# Altium PCB power.PcbDoc
Units mm, origin at the board's own origin, x right, y up, seen from the top; angles counter-clockwise.
Board outline 169.7 x 138.9 mm, 2 copper layers (Top Layer, Bottom Layer); 53 components, 30 nets, 201 pads, 0 vias.
Unrouted connection lines stored in the file: 2.
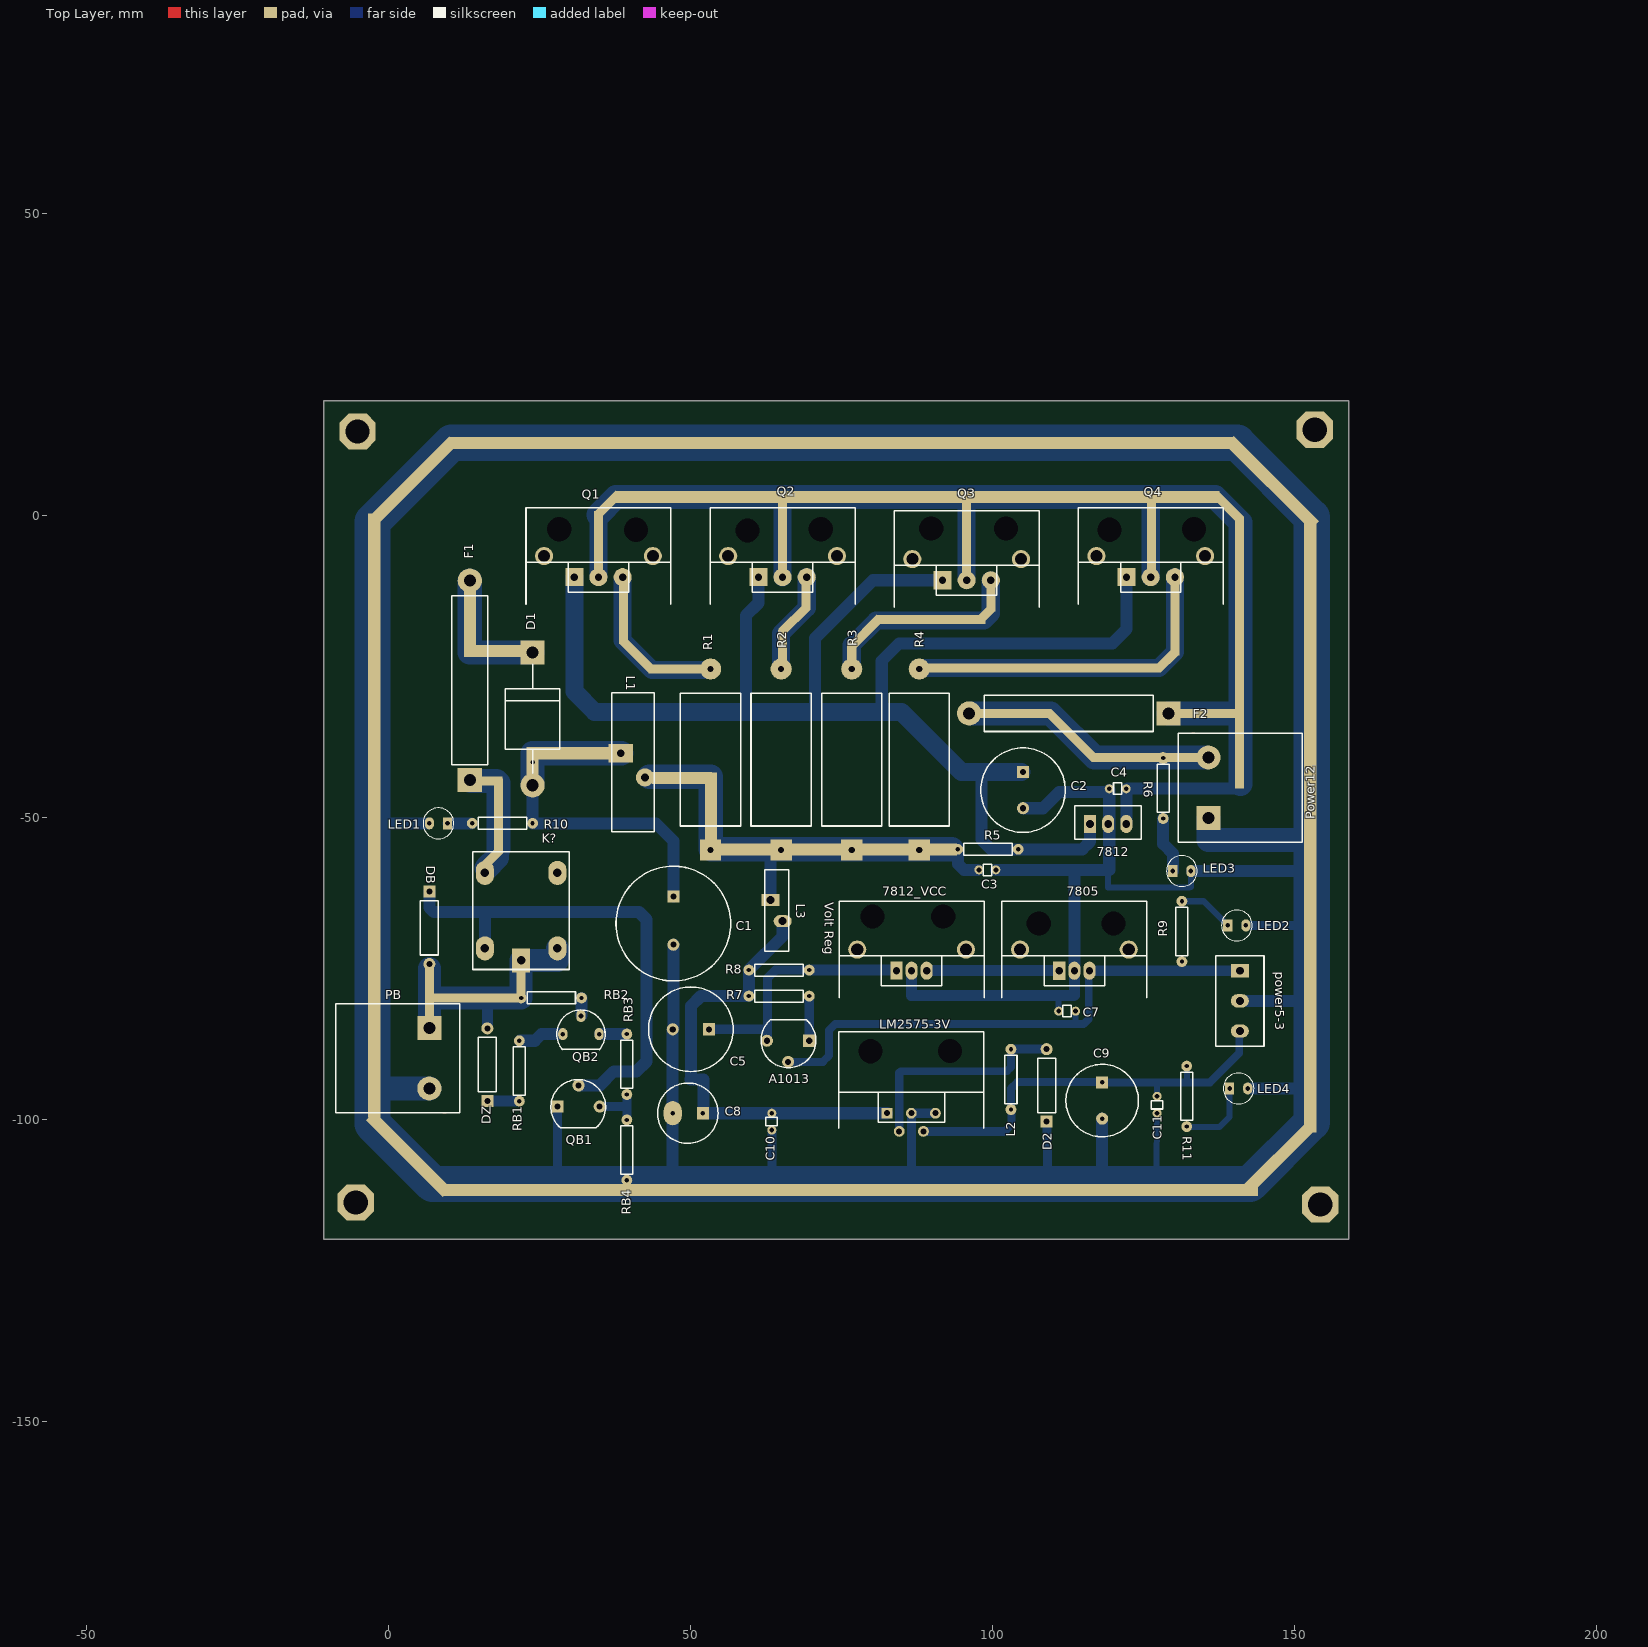
[diagram p0: Top Layer view]
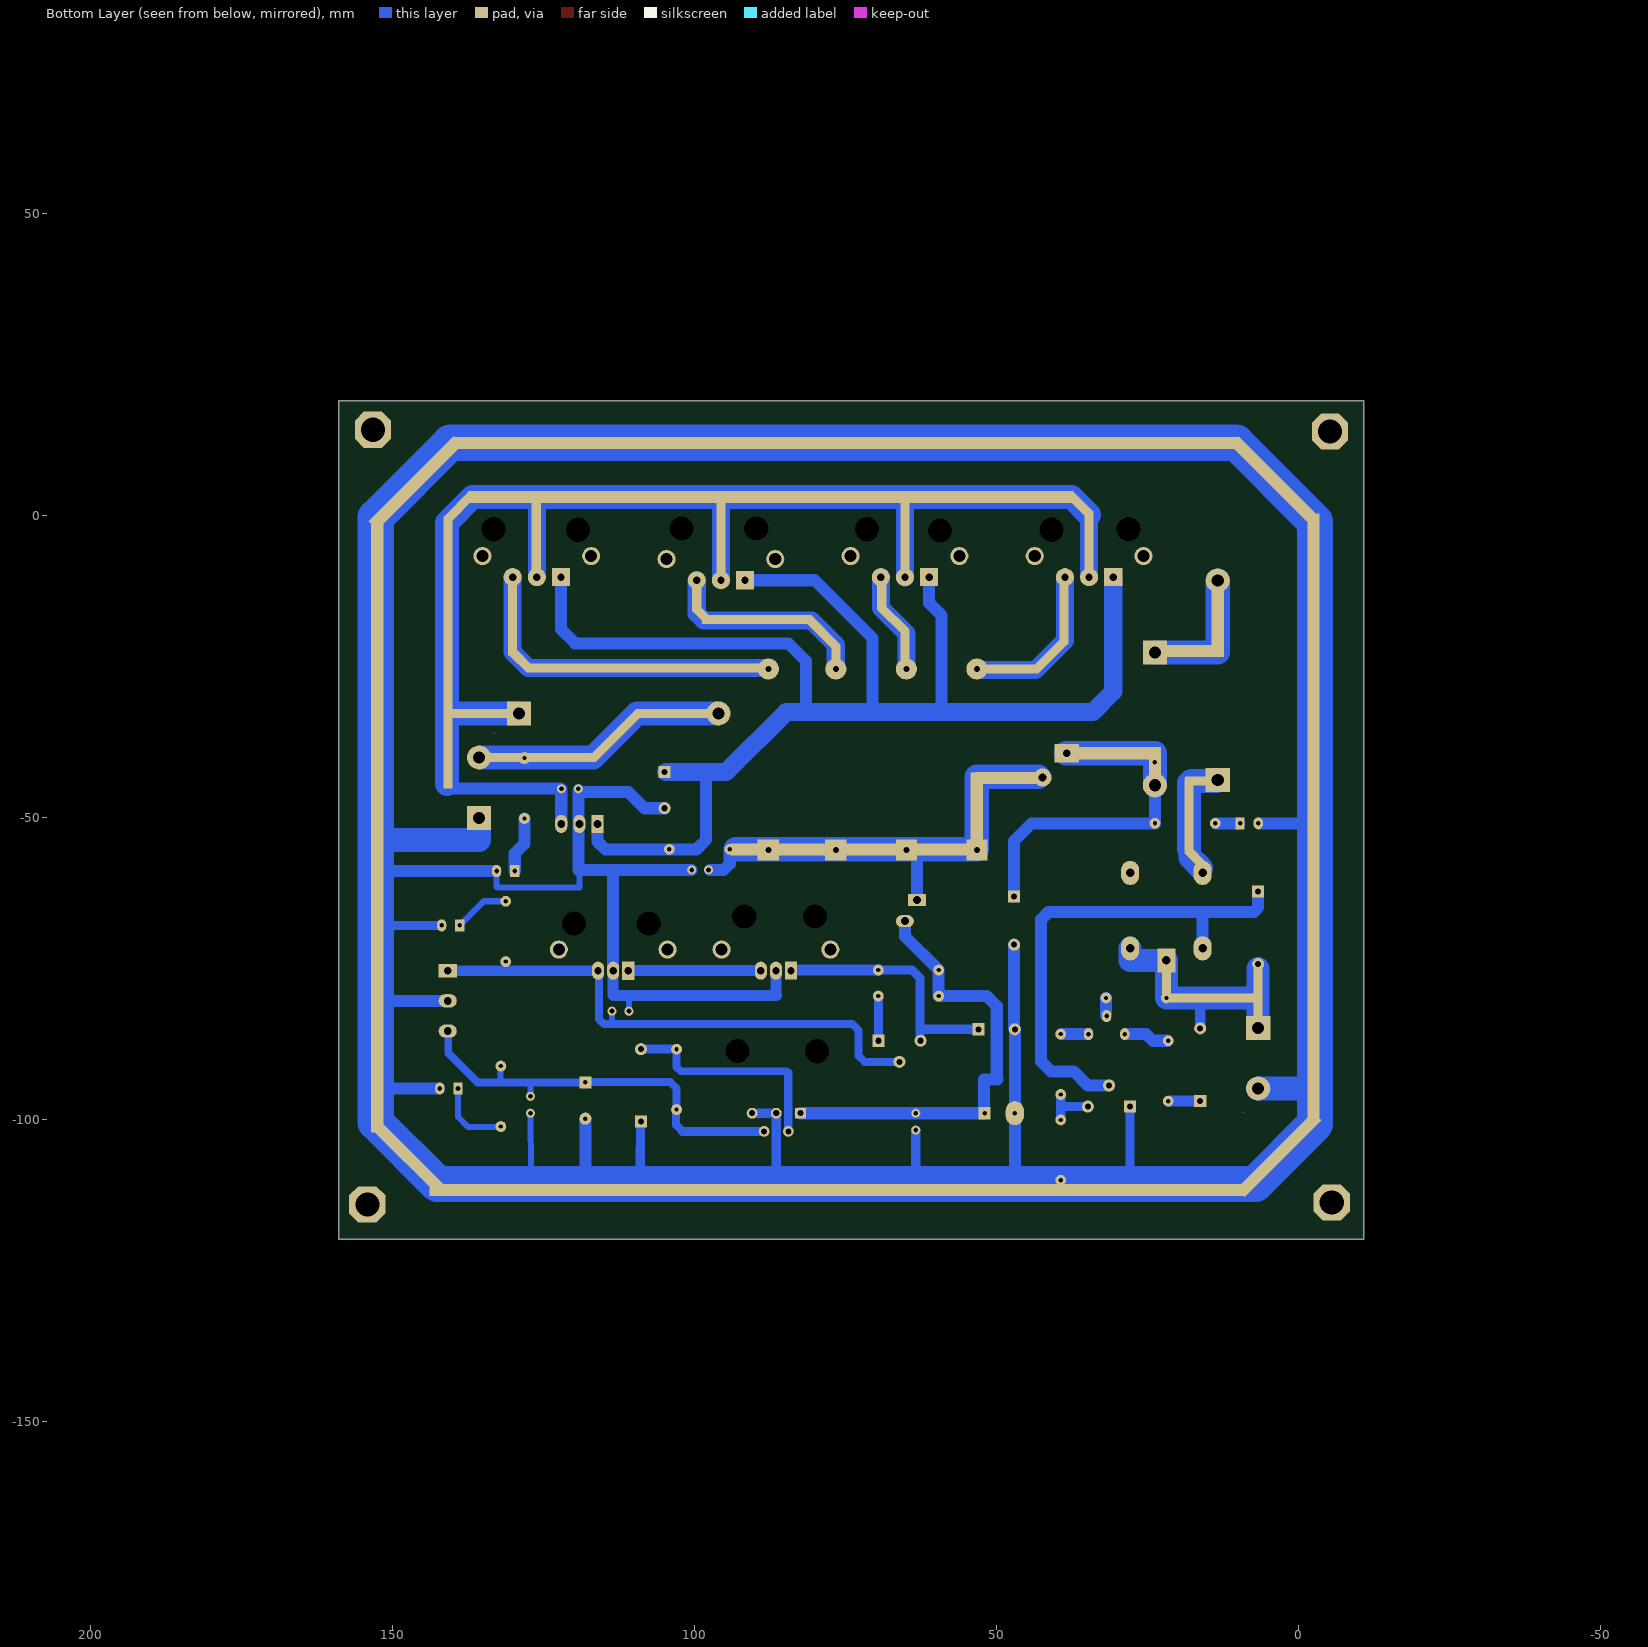
[diagram p1: Bottom Layer view, seen from below]

## Layer stack, top to bottom
Top Layer: signal copper 0.0356
Dielectric: dielectric 0.32, FR-4, Dk 4.8
Bottom Layer: signal copper 0.0356

## Board outline
-10.6,19.1 158.9,19.1 158.9,-119.8 -10.8,-119.8 -10.8,19.1

## Design rules (kind name [scope] priority, off if disabled: settings)
Clearance [All] p1: gap=0.254
FabricationTestPointUsage TestPointUsage [All] p1: valid=0 allowmultiple=FALSE
FabricationTestpoint Testpoint [All] p1: side=3 testpointundercomponent=TRUE minsize=1.016 maxsize=2.54 preferedsize=1.524 minholesize=0 maxholesize=1.016 preferedholesize=0.813 testpointgrid=0.025 allowsidetop=TRUE allowsidebottom=TRUE usegrid=TRUE gridtolerance=0
PolygonConnect [All] p1: connectstyle=Relief reliefconductorwidth=0.254 reliefentries=4 polygonreliefangle="90 Angle"
RoutingVias [All] p1: holewidth=0.711 width=1.27 viastyle="Through Hole" minholewidth=0.711 minwidth=1.27 maxholewidth=0.711 maxwidth=1.27
SilkscreenOverComponentPads [All] p1: minsilkscreentomaskgap=0.254
SolderMaskExpansion [All] p1: expansion=0.102
Width [All] p1: maxlimit=0.254 minlimit=0.254 preferedwidth=0.254
25 further rules are at their usual default settings.

## Components (designator, comment, footprint, x,y, rotation, side; value= is the part's Value field where it differs from the comment)
7805 "Volt Reg" 78xx 113.5,-75.3 r0 top
7812 "Volt Reg" 78xx_NO 118.6,-51 r0 top
7812_VCC "Volt Reg" 78xx 86.548,-75.299 r0 top
A1013 "PNP" D468/A1013 68.6,-86.9 r180 top
C1 "Cap2" "Tu 4700u/35V" 47.1,-63 r270 top
C2 "Cap2" "Tu 1000u/50V" 105,-42.4 r270 top
C3 "Cap Semi" tu_gom 98.7,-58.7 r180 top
C4 "Cap Semi" tu_gom 121.076,-45.076 r0 top
C5 "Cap2" "Tu 1000u/50V" 53,-85 r180 top
C7 "Cap Semi" tu_gom 112.7,-81.9 r0 top
C8 "Cap2" "TU 220uF/50V" 52,-98.9 r180 top
C9 "Cap2" "TU 470uF/50V" 118.1,-93.8 r270 top
C10 "Cap Semi" tu_gom 63.3,-99.9 r90 top
C11 "Cap Semi" tu_gom 127.1,-97.1 r90 top
D1 "Diode" D_10A 23.8,-30.6 r270 top
D2 "Diode" D_1A 108.9,-100.3 r90 top
DB "Diode" D_1A 6.7,-62.2 r270 top
DZ "D Zener 30V" D_1A 16.3,-96.849 r90 top
F1 "Fuse 1" FUSE_10A 13.4,-43.7 r90 top
F2 "Fuse 2" FUSE_10A 129.08,-32.692 r180 top
K? "Relay-SPDT" "Role 12V" 25.9,-63.1 r270 top
L1 "Inductor" "Cuon cam to" 35.4,-40.3 r0 top
L2 "Inductor" R_Nor#1 103,-93.3 r270 top
L3 "Inductor" "Cuon cam nho" 61.2,-64.6 r0 top
LED1 "LED" LED_3 8.7,-50.9 r180 top
LED2 "LED" LED_3 139.9,-67.8 r0 top
LED3 "LED" LED_3 130.8,-58.8 r0 top
LED4 "LED" LED_3 140.2,-94.8 r0 top
LM2575-3V "LM2575-xx" LM2575_3 82.5,-98.9 r0 top
PB "Header 2" Header_nguon_20A 6.7,-84.8 r270 top
power5-3 "Header 3" HEADER3 140.9,-80.3 r270 top
Power12 "Header 2" Header_nguon_20A 135.7,-50 r90 top
Q1 "TIP42C" TIP42C 33.703,-13.642 r0 top
Q2 "TIP42C" TIP42C 64.183,-13.642 r0 top
Q3 "TIP42C" TIP42C 94.663,-14.15 r0 top
Q4 "TIP42C" TIP42C 125.143,-13.642 r0 top
QB1 "D468" D468/A1013 28.9,-97.8 r0 top
QB2 "2N3904" C1815 31.3,-85.3 r0 top
R1 "Res3" R_CS1R/5W 53.271,-55.341 r90 top
R2 "Res3" R_CS1R/5W 64.955,-55.341 r90 top
R3 "Res3" R_CS1R/5W 76.639,-55.341 r90 top
R4 "Res3" R_CS1R/5W 87.815,-55.341 r90 top
R5 "Res3" R_Nor#1 99.2,-55.2 r0 top
R6 "Res3" R_Nor#2 128.2,-45.1 r90 top
R7 "Res3" R_Nor#1 64.6,-79.5 r0 top
R8 "Res3" R_Nor#1 64.6,-75.2 r0 top
R9 "Res3" R_Nor#1 131.3,-68.8 r270 top
R10 "Res3" R_Nor#1 18.8,-50.9 r0 top
R11 "Res3" R_Nor#1 132.1,-96.1 r90 top
RB1 "Res3" R_Nor#1 21.6,-91.9 r270 top
RB2 "Res3" R_Nor#1 26.9,-79.8 r0 top
RB3 "Res3" R_Nor#1 39.4,-90.8 r270 top
RB4 "Res3" R_Nor#1 39.4,-105 r90 top

## Footprints (in the part's own frame and the unit in brackets; to place one, negate y for a bottom-side part, rotate by r counter-clockwise, add the part's x,y. Pads: shape width x height; smd on the part's side, far side on the other; paste and mask are expansions set on the pad)
78xx [mm]
  rect 2x3 hole 1.2: 1(-2.5,0)
  oval 2x3 hole 1.2: 2(0,0) 3(2.5,0)
  round 3 hole 2: 4(-9,3.5) 6(9,3.5)
  silkscreen extent -12,-4.5 12,11.5
78xx_NO [mm]
  rect 2x3 hole 1.3: 1(-2.5,0)
  oval 2x3 hole 1.3: 2(0.5,0) 3(3.5,0)
  silkscreen extent -5,-2.5 6,3
C1815 [mm]
  oval 1.524x2 hole 0.762: 1(3.5,-0.5) 2(0.5,2.5) 3(-2.5,-0.5)
  silkscreen extent -3.5,-3.06 4.5,3.5
"Cuon cam nho" [mm]
  rect 3x2 hole 1.3: 1(2,1)
  oval 3x2 hole 1.3: 2(4,-2.5)
  silkscreen extent 1,-7.5 5,6
"Cuon cam to" [mm]
  rect 4x3 hole 1.3: 1(3,1)
  round 3 hole 1.3: 2(7,-3)
  silkscreen extent 1.5,-12 8.5,11
D468/A1013 [mm]
  rect 2x2 hole 1: 1(-1,0)
  round 2 hole 1: 2(2.5,3.5) 3(6,0)
  silkscreen extent -2.08,-3.5 6.97,4.47
D_1A [mm]
  rect 2x2 hole 1: 1(0,0)
  round 2 hole 1: 2(12,0)
  silkscreen extent 1.5,-1.5 10.5,1.5
D_10A [mm]
  rect 4x4 hole 2: 1(-8,0)
  round 4 hole 2: 2(14,0)
  silkscreen extent -6,-4.5 12,4.5
FUSE_10A [mm]
  rect 4x4 hole 2: 1(0,0)
  round 4 hole 2: 2(33,0)
  silkscreen extent 2.5,-3 30.5,3
HEADER3 [mm]
  rect 2.2x3 hole 1.3: 1(-5,0)
  oval 2.2x3 hole 1.3: 2(0,0) 3(5,0)
  silkscreen extent -7.5,-4 7.5,4
Header_nguon_20A [mm]
  rect 4x4 hole 2: 1(0,0)
  round 4 hole 2: 2(10,0)
  Top Layer lines w0.254: 14,2.246 14,2.754
  silkscreen extent -4,-15.5 14,5
LED_3 [mm]
  rect 1.524x2 hole 0.762: 1(-1,0)
  oval 1.524x2 hole 0.762: 2(2,0)
  silkscreen extent -2.05,-2.55 3.05,2.55
LM2575_3 [mm]
  rect 1.8x1.8 hole 1: 1(0,0)
  round 1.8 hole 1: 2(2,-3) 3(4,0) 4(6,-3) 5(8,0)
  silkscreen extent -8,-2.5 16,13.5
R_CS1R/5W [mm]
  rect 3.5x3.5 hole 1: 1(0,0)
  round 3.5 hole 1: 2(30,0)
  silkscreen extent 4,-5 26,5
R_Nor#1 [mm]
  round 1.8 hole 0.7: 1(-5,0) 2(5,0)
  silkscreen extent -4,-1 4,1
R_Nor#2 [mm]
  round 1.8 hole 0.7: 1(-5,0)
  round 2 hole 0.7: 2(5,0)
  silkscreen extent -4,-1 4,1
"Role 12V" [mm]
  rect 4x3 hole 1.4: 1(10.5,-4)
  oval 4x3 hole 1.4: 2(-4,-10) 3(-4,2) 4(8.5,2) 5(8.5,-10)
  silkscreen extent -7.5,-12 12,4
TIP42C [mm]
  rect 3x3 hole 1.2: 1(-3,3.5)
  round 3 hole 1.2: 2(1,3.5) 3(5,3.5)
  round 3 hole 2: 4(-8,7) 6(10,7)
  silkscreen extent -11,-1 13,15
"TU 220uF/50V" [mm]
  rect 2x2 hole 0.762: 1(0,0)
  oval 3x4 hole 0.762: 2(5,0)
  silkscreen extent -2.5,-5 7.5,5
"TU 470uF/50V" [mm]
  rect 2x2 hole 0.762: 1(0,0)
  round 2 hole 0.762: 2(6,0)
  silkscreen extent -3,-6 9,6
"Tu 1000u/50V" [mm]
  rect 2x2 hole 1: 1(0,0)
  round 2 hole 1: 2(6,0)
  silkscreen extent -4,-7 10,7
"Tu 4700u/35V" [mm]
  rect 2x2 hole 1: 1(0,0)
  round 2 hole 1: 2(8,0)
  silkscreen extent -5,-9.5 14,9.5
tu_gom [mm]
  round 1.5 hole 0.8: 1(-1.8,-0.1) 2(1,-0.1)
  silkscreen extent -1.1,-1 0.3,0.9

## Part data
7805 7812 7812_VCC: "Voltage Regulator"
A1013: "PNP Bipolar Transistor"
C1 C2 C5 C8 C9: "Capacitor"
C3 C4 C7 C10 C11: "Capacitor (Semiconductor SIM Model)"
DZ: library part "D Zener", "Zener Diode"
F1: library part "Fuse 2", "Fuse"
F2: "Fuse"
K?: "Single-Pole Dual-Throw Relay"
LM2575-3V: library part LM2575-3V
PB Power12: "Header, 2-Pin"
power5-3: "Header, 3-Pin"
Q1 Q2 Q3 Q4: library part PNP, "PNP Bipolar Transistor"
QB1 QB2: library part NPN, "NPN Bipolar Transistor"
R1 R2 R3 R4 R5 R6 R7 R8 R9 R10 R11 RB1 RB2 RB3 RB4: "Resistor"

## Free pads (board coordinates)
  rect 2x10 all layers, no hole: 0(13.4,-17.175)
  rect 10x2 all layers, no hole: 1(17.4,-22.4) 2(48.525,-43.375)
  shape0 0x0 all layers, no hole paste+0 mask+0: 1(122.076,-45.176)
  rect 13x2 all layers, no hole: 2(29.95,-39.3)
  rect 2x12 all layers, no hole: 2(53.3,-48.45)
  rect 2x5 hole 0.762: 3(23.8,-40.775)
  rect 40x2 all layers, no hole: 6(74.106,-55.2)
  rect 2x100 all layers, no hole: 11(-2.424,-49.612)
  rect 2x18 all layers, no hole rot 45: 11(3.274,-105.748)
  rect 2x18 all layers, no hole rot 135: 11(4.299,6.123)
  rect 1.5x8 all layers, no hole: 11(6.7,-78.88)
  rect 15x1.5 all layers, no hole: 11(13.946,-79.8)
  rect 4x1.5 all layers, no hole: 11(16.821,-43.891)
  rect 1.5x4 all layers, no hole rot 135: 11(17.021,-56.685) 11(128.7,-23.996)
  rect 1.5x12 all layers, no hole: 11(18.136,-49.487) 11(65.183,-3.324) 11(95.663,-3.599) 11(126.243,-3.499)
  rect 1.5x5 all layers, no hole: 11(21.9,-76.905) 11(99.663,-13.297)
  rect 1.5x10 all layers, no hole: 11(34.716,-4.149) 11(38.84,-16.246)
  rect 1.5x5 all layers, no hole rot 135: 11(36.291,1.95)
  rect 1.5x7 all layers, no hole rot 45: 11(41.062,-23.016)
  rect 9x1.5 all layers, no hole: 11(47.463,-25.344)
  rect 1.5x6 all layers, no hole: 11(65.183,-21.769) 11(69.032,-12.522)
  rect 1.5x6 all layers, no hole rot 135: 11(67.158,-17.121)
  rect 130x2 all layers, no hole: 11(75.056,12.1)
  rect 135x2 all layers, no hole: 11(76.38,-111.621)
  rect 1.5x3 all layers, no hole: 11(76.639,-22.844)
  rect 1.5x7 all layers, no hole rot 135: 11(78.855,-19.345)
  rect 100x2 all layers, no hole: 11(87.503,3.122)
  rect 18x1.5 all layers, no hole: 11(89.802,-17.146)
  rect 1.5x3 all layers, no hole rot 135: 11(98.85,-16.271)
  rect 12x1.5 all layers, no hole: 11(103.723,-32.692)
  rect 40x1.5 all layers, no hole: 11(107.797,-25.2)
  rect 1.5x11 all layers, no hole rot 45: 11(113.046,-36.366)
  rect 19x1.5 all layers, no hole: 11(125.818,-40)
  rect 1.5x14 all layers, no hole: 11(130.143,-16.096)
  rect 10x1.5 all layers, no hole: 11(135.915,-32.742)
  rect 1.5x6 all layers, no hole rot 45: 11(138.914,1.475)
  rect 1.5x45 all layers, no hole: 11(140.839,-22.594)
  rect 2x20 all layers, no hole rot 45: 11(146.238,5.449)
  rect 2x15 all layers, no hole rot 135: 11(147.262,-106.398)
  rect 2x101 all layers, no hole: 11(152.561,-51.587)
  round 0 hole 4: 41(28.2,-2.2) 41(40.9,-2.3) 41(59.4,-2.4) 41(71.5,-2.2) 41(79.756,-88.646) 41(80.1,-66.3) 41(89.8,-2.1) 41(91.8,-66.3) 41(92.913,-88.57) 41(102.2,-2.1) 41(107.6,-67.5) 41(119.3,-2.3) 41(120,-67.5) 41(133.3,-2.2)
  oct 6x6 hole 4: 42(-5.182,13.97) 43(153.289,14.275) 44(154.203,-113.995) 45(-5.486,-113.69)

## Nets (pads, with @x,y where several pads share a name; then routed paths per layer and width w, separated by ;. In a path a pad name is that pad's centre, name@x,y a point inside that pad or via, vN(x,y) a via of type N, cw(c..) or ccw(c..) an arc to the next point about the centre after c; other vN are vias at no path point)
3V: C9.1 C11.2 L2.2 LM2575-3V.4 power5-3.3 R11.2 | length 68.7
  Bottom Layer w0.254: LM2575-3V.4@88.443,-102.057 88.443,-101.957 LM2575-3V.4@88.47,-101.93 ; L2.2@102.997,-98.297 L2.2@103.073,-98.373
  Bottom Layer w1: C11.2 127.2,-94 ; 132.182,-93.622 R11.2@132.182,-91.186
  Bottom Layer w1.3: 101.981,-101.93 103.048,-100.863 ; L2.2@102.997,-98.297 102.997,-94.793 104.038,-93.751 C9.1@117.907,-93.751 ; 103.073,-100.838 L2.2@103.073,-98.373 ; C9.1 135.939,-93.8 140.8,-88.939 power5-3.3@140.8,-86.079
  Bottom Layer w1.5: LM2575-3V.4@88.47,-101.93 101.981,-101.93
5V: 7805.3 A1013.2 C7.2 power5-3.1 R9.2 | length 91.8
  Bottom Layer w0.254: 72.898,-85.166 73.025,-85.039 73.025,-85.014 ; 113.7,-84.109 113.716,-84.125 ; 7805.3@115.868,-75.432 7805.3 ; 131.293,-75.3 131.3,-75.293
  Bottom Layer w1: 113.7,-84.109 C7.2 ; 131.3,-75.293 R9.2
  Bottom Layer w1.3: A1013.2 71.855,-90.4 72.898,-89.357 72.898,-85.166 ; 73.025,-85.014 73.914,-84.125 115.037,-84.125 115.868,-83.293 7805.3@115.868,-75.432
  Bottom Layer w1.8: 7805.3 power5-3.1
12V: F2.2 pad.11@103.723,-32.692 pad.11@113.046,-36.366 pad.11@125.818,-40 Power12.2 R6.2 | length 42.1
  Bottom Layer w0.254: 129,-41.408 129.08,-41.488
  Bottom Layer w4: F2.2@96.45,-32.692 109.547,-32.692 116.855,-40 Power12.2@135.4,-40
GND: 7805.2 7812.2 7812_VCC.2 C1.2 C2.2 C3.1 C4.1 C5.2 C7.1 C8.2 C9.2 C10.1 C11.1 D2.1 LED1.2 LED2.2 LED3.2 LED4.2 LM2575-3V.3 LM2575-3V.5 pad.11@3.274,-105.748 pad.11@4.299,6.123 pad.11@75.056,12.1 pad.11@76.38,-111.621 pad.11@146.238,5.449 pad.11@147.262,-106.398 pad.11@152.561,-51.587 pad.11@-2.424,-49.612 pad.42 pad.45 PB.2 power5-3.2 Power12.1 QB1.1 RB4.1 | length 868.4
  Bottom Layer w0.254: pad.11@-2.7,-94.2 pad.11@-2.1,-94.8 ; pad.11@-2.7,-51 -2.5,-51.2 -0.4,-51.2 ; 27.788,-110.134 27.9,-110.022 ; C5.2@47.1,-84.9 C5.2@47.2,-85 ; 47.142,-109.322 47.193,-109.271 ; C8.2@47.193,-100.507 C8.2@47.2,-100.5 ; 49.504,-108.737 63.398,-108.737 63.4,-108.736 63.4,-108.407 ; 86.487,-79.4 86.548,-79.339 ; 86.5,-108.141 86.538,-108.179 ; LM2575-3V.5 LM2575-3V.5@90.533,-98.933 ; 109.017,-108.407 109,-108.238 109.017,-108.255 ; 110.871,-79.4 110.9,-79.429 ; 113.4,-58.6 113.5,-58.7 ; 113.462,-79.4 113.5,-79.362 ; 117.932,-110.033 117.984,-109.521 118.1,-109.405 ; C4.1@118.752,-45.7 C4.1 ; 119.05,-58.6 119.101,-58.651 ; 121.266,-108.966 127.229,-108.966 127.2,-108.937 127.097,-108.493 ; 132.715,-61.874 132.8,-61.789 ; 147.3,-54.1 151.56,-54.1 ; 148.626,-80.3 148.717,-80.391 151.308,-80.391 151.333,-80.366 ; 151.1,-58.8 151.2,-58.7 ; 151.25,-67.8 151.333,-67.716 ; pad.11@152.675,-94.8 pad.11@152.8,-94.675
  Bottom Layer w1: C7.1@110.9,-82.3 110.9,-79.429 ; 119.101,-58.651 119.101,-61.499 132.59,-61.499 ; 127.097,-108.493 C11.1 ; 132.8,-61.45 LED3.2
  Bottom Layer w1.5: 27.9,-110.022 QB1.1 ; 63.4,-108.407 C10.1@63.4,-101.7 ; 86.5,-108.661 LM2575-3V.3 LM2575-3V.5 ; D2.1@109,-100.4 109.017,-108.407 ; LED2.2 151.25,-67.8
  Bottom Layer w1.8: 86.487,-79.4 113.462,-79.4 ; 86.548,-79.339 7812_VCC.2 ; 113.5,-79.362 7805.2
  Bottom Layer w2: -0.4,-51.2 -0.1,-50.9 LED1.2@6.4,-50.9 ; 46.965,-109.85 C5.2@46.965,-84.924 ; C5.2@47.1,-84.9 C1.2 ; C3.1 119.276,-58.6 ; C2.2 108.3,-48.4 111,-45.7 C4.1@118.752,-45.7 ; 7805.2 113.5,-58.7 ; 118.1,-109.405 C9.2 ; 119.276,-58.4 C4.1@119.276,-45.4 ; LED3.2@133,-58.8 151.1,-58.8 ; power5-3.2 pad.11@151.587,-80.3 ; LED4.2@142.45,-94.8 pad.11@152.675,-94.8
  Bottom Layer w4: pad.11@-2.1,-94.8 PB.2 ; Power12.1 135.7,-53.65 153.75,-53.65
  Bottom Layer w6: pad.11@-2.7,-100.7 7.2,-110.6 142.6,-110.6 152.8,-100.4 152.8,-0.239 140.461,12.1 10.35,12.1 -2.7,-0.95 pad.11@-2.7,-100.7
Net7805_1: 7805.1 7812_VCC.3 | length 21.7
  Bottom Layer w1.8: 7812_VCC.3@89.256,-75.286 7805.1@110.986,-75.286
Net7812_1: 7812.1 C2.1 Q1.1 Q2.1 Q3.1 Q4.1 R5.2 | length 250
  Bottom Layer w2: 59.113,-31.338 59.113,-16.487 61.183,-14.417 Q2.1 ; 70.543,-31.338 70.543,-20.257 80.15,-10.65 Q3.1 ; 81.6,-32.7 81.6,-24 84.5,-21.1 119.8,-21.1 122.143,-18.757 Q4.1 ; 98.1,-42.4 98.1,-53.6 99.7,-55.2 114.8,-55.2 116.1,-53.9 7812.1
  Bottom Layer w3: Q1.1 30.703,-29.057 34.084,-32.438 84.838,-32.438 94.8,-42.4 C2.1@104.723,-42.4
Net7812_3: 7812.3 C4.2 F2.1 pad.1@122.076,-45.176 pad.11@34.716,-4.149 pad.11@36.291,1.95 pad.11@65.183,-3.324 pad.11@87.503,3.122 pad.11@95.663,-3.599 pad.11@126.243,-3.499 pad.11@135.915,-32.742 pad.11@138.914,1.475 pad.11@140.839,-22.594 Q1.2 Q2.2 Q3.2 Q4.2 | length 239.1
  Bottom Layer w0.254: pad.11@65.183,2.979 pad.11@65.326,3.122
  Bottom Layer w2: 7812.3 C4.2@122.1,-45.2 ; C4.2@122.3,-45.1 140.925,-45.1
  Bottom Layer w3: Q1.2@34.703,-9.925 pad.11@34.703,0.203 ; Q2.2@65.183,-10.225 pad.11@65.183,2.979 ; Q3.2@95.663,-10.475 pad.11@95.663,3.106 ; Q4.2 pad.11@126.143,3.122
  Bottom Layer w4: pad.11@34.703,0.203 37.622,3.122 136.778,3.122 140.989,-1.089 pad.11@140.989,-44.414 ; F2.1@129.08,-32.727 pad.11@140.792,-32.727
Net7812_VCC_1: 7812_VCC.1 A1013.3 C5.1 R8.2 | length 42.1
  Bottom Layer w0.254: A1013.3 A1013.3@62.713,-86.787 ; 62.648,-85 62.713,-85.065 ; 7812_VCC.1@83.949,-75.2 7812_VCC.1
  Bottom Layer w1.5: C5.1 62.648,-85 ; A1013.3@62.713,-86.787 62.713,-76.505 64.017,-75.2 R8.2@69.418,-75.2
  Bottom Layer w1.8: R8.2@69.418,-75.2 7812_VCC.1@83.949,-75.2
NetA1013_1: A1013.1 R7.2 | length 7.4
  Bottom Layer w1.5: A1013.1 R7.2
NetC1_1: C1.1 D1.2 L1.1 pad.2@29.95,-39.3 pad.3 R10.2 | length 59
  Bottom Layer w2: D1.2@23.8,-45.5 R10.2 44.2,-50.9 47.1,-53.8 C1.1
  Bottom Layer w4: D1.2@23.8,-44.5 23.8,-39.3 L1.1@38.5,-39.3
NetC3_2: C3.2 L1.2 L3.1 pad.2@48.525,-43.375 pad.2@53.3,-48.45 pad.6 R1.1 R2.1 R3.1 R4.1 R5.1 | length 75.4
  Bottom Layer w0.254: 63.119,-56.464 63.2,-56.545
  Bottom Layer w2: L3.1 63.2,-56.545 ; R5.1 94.2,-57.6 95.2,-58.6 C3.2@97.5,-58.6
  Bottom Layer w4: L1.2@43.1,-43.2 53.3,-43.2 53.3,-55.2 pad.6@93.2,-55.2
NetC8_1: C8.1 C10.2 L3.2 LM2575-3V.1 R7.1 R8.1 | length 73.8
  Bottom Layer w0.254: C8.1@52.113,-98.9 C8.1@52.121,-98.908
  Bottom Layer w2: 49.911,-93.27 52.07,-93.346 52.07,-97.597 ; 49.987,-93.175 49.987,-81.178 51.666,-79.5 R7.1 R8.1 65.2,-69.6 L3.2 ; C8.1@52.121,-98.9 LM2575-3V.1
NetD1_1: D1.1 F1.2 pad.0 pad.1@17.4,-22.4 | length 22.3
  Bottom Layer w4: F1.2 13.4,-22.6 D1.1
NetD2_2: D2.2 L2.1 LM2575-3V.2 | length 37.4
  Bottom Layer w0.254: 84.5,-98.913 84.506,-98.908 ; 84.506,-92.227 84.785,-91.948
  Bottom Layer w1.3: 84.785,-91.948 102.317,-91.948 103,-91.265 L2.1
  Bottom Layer w1.4: LM2575-3V.2 84.5,-98.913 ; 84.506,-98.908 84.506,-92.227
  Bottom Layer w1.5: L2.1 D2.2
NetDB_1: DB.1 K?.5 QB1.2 | length 81.8
  Bottom Layer w2: DB.1 6.7,-64.852 7.442,-65.594 41.413,-65.594 42.647,-66.827 42.647,-90.322 40.996,-91.973 37.252,-91.973 34.925,-94.3 QB1.2 ; K?.5 15.9,-65.634
NetDB_2: DB.2 DZ.2 K?.1 K?.4 pad.11@6.7,-78.88 pad.11@13.946,-79.8 pad.11@21.9,-76.905 PB.1 RB2.1 | length 44.5
  Bottom Layer w0.254: DZ.2@16.251,-84.8 DZ.2@16.3,-84.751 ; pad.11@16.3,-79.8 16.395,-79.705 16.395,-78.982 ; RB2.1@21.869,-79.807 RB2.1@21.9,-79.776
  Bottom Layer w1.8: DZ.2@16.3,-84.751 pad.11@16.3,-79.8
  Bottom Layer w3.8: PB.1@6.7,-84.526 DB.2@6.7,-74.95 ; pad.11@6.834,-79.8 pad.11@16.3,-79.8 ; pad.11@16.459,-79.807 RB2.1@21.869,-79.807 ; RB2.1@21.9,-79.776 K?.1 27.9,-73.6 K?.4
NetDZ_1: DZ.1 RB1.2 | length 5.3
  Bottom Layer w0.254: RB1.2@21.549,-96.849 RB1.2@21.6,-96.798
  Bottom Layer w1.8: DZ.1 RB1.2@21.549,-96.849
NetF1_1: F1.1 K?.2 pad.11@16.821,-43.891 pad.11@17.021,-56.685 pad.11@18.136,-49.487 | length 19.2
  Bottom Layer w0.254: pad.11@17.907,-56.566 pad.11@17.907,-55.397
  Bottom Layer w4: F1.1@13.564,-43.891 17.78,-43.891 18.136,-44.247 pad.11@18.136,-55.168 ; K?.2@16.205,-58.268 pad.11@17.907,-56.566
NetLED1_1: LED1.1 R10.1 | length 3.8
  Bottom Layer w2: LED1.1@9.9,-50.9 R10.1@13.7,-50.9
NetLED2_1: LED2.1 R9.1 | length 9.3
  Bottom Layer w1: R9.1 134.9,-63.8 LED2.1
NetLED3_1: LED3.1 R6.1 | length 9.4
  Bottom Layer w2: R6.1 128.2,-54.3 129.8,-55.9 LED3.1
NetLED4_1: LED4.1 R11.1 | length 12.4
  Bottom Layer w1: R11.1@132.143,-101.143 137.566,-101.143 139.2,-99.509 LED4.1
NetQ1_3: pad.11@38.84,-16.246 pad.11@41.062,-23.016 pad.11@47.463,-25.344 Q1.3 R1.2 | length 26.6
  Bottom Layer w3: Q1.3@38.703,-10.6 38.703,-20.658 43.545,-25.5 R1.2@53.2,-25.5
NetQ2_3: pad.11@65.183,-21.769 pad.11@67.158,-17.121 pad.11@69.032,-12.522 Q2.3 R2.2 | length 17.2
  Bottom Layer w3: R2.2@64.955,-25.115 R2.2 64.955,-19.445 69.183,-15.217 Q2.3@69.183,-10.142
NetQ3_3: pad.11@76.639,-22.844 pad.11@78.855,-19.345 pad.11@89.802,-17.146 pad.11@98.85,-16.271 pad.11@99.663,-13.297 Q3.3 R3.2 | length 34.7
  Bottom Layer w3: R3.2@76.639,-25.468 76.639,-21.361 80.7,-17.3 98.5,-17.3 99.663,-16.137 Q3.3@99.663,-10.722
NetQ4_3: pad.11@107.797,-25.2 pad.11@128.7,-23.996 pad.11@130.143,-16.096 Q4.3 R4.2 | length 56.3
  Bottom Layer w3: R4.2@87.6,-25.2 127.496,-25.2 130.143,-22.553 Q4.3@130.143,-10.142 ; R4.2 R4.2@87.97,-25.496
NetQB1_3: QB1.3 RB3.2 RB4.2 | length 8.5
  Bottom Layer w1.5: QB1.3 39.345,-97.8 ; RB4.2@39.395,-100 RB3.2@39.395,-95.987
NetQB2_1: QB2.1 RB3.1 | length 4.3
  Bottom Layer w2: QB2.1@34.941,-85.8 RB3.1@39.29,-85.8
NetQB2_2: QB2.2 RB2.2 | length 3
  Bottom Layer w0.254: QB2.2 QB2.2@31.9,-82.7
  Bottom Layer w2: QB2.2@31.9,-82.7 RB2.2
NetQB2_3: QB2.3 RB1.1 | length 7
  Bottom Layer w2: RB1.1@21.719,-86.9 24.147,-86.9 25.247,-85.8 QB2.3@28.293,-85.8
pads on no net: 7805.4 7805.6 7812_VCC.4 7812_VCC.6 K?.3 Q1.4 Q1.6 Q2.4 Q2.6 Q3.4 Q3.6 Q4.4 Q4.6

## Other copper
Multi-Layer:
  lines w0.254 net Net7812_3: 122.076,-45.176 122.1,-45.2